# Altium PCB PCB1.PcbDoc
Units mil, origin at the board's own origin, x right, y up, seen from the top; angles counter-clockwise.
Board outline 3351 x 1044 mil, 2 copper layers (Top Layer, Bottom Layer), stack 60.4 mil thick; 8 components, 6 nets, 22 pads, 0 vias.
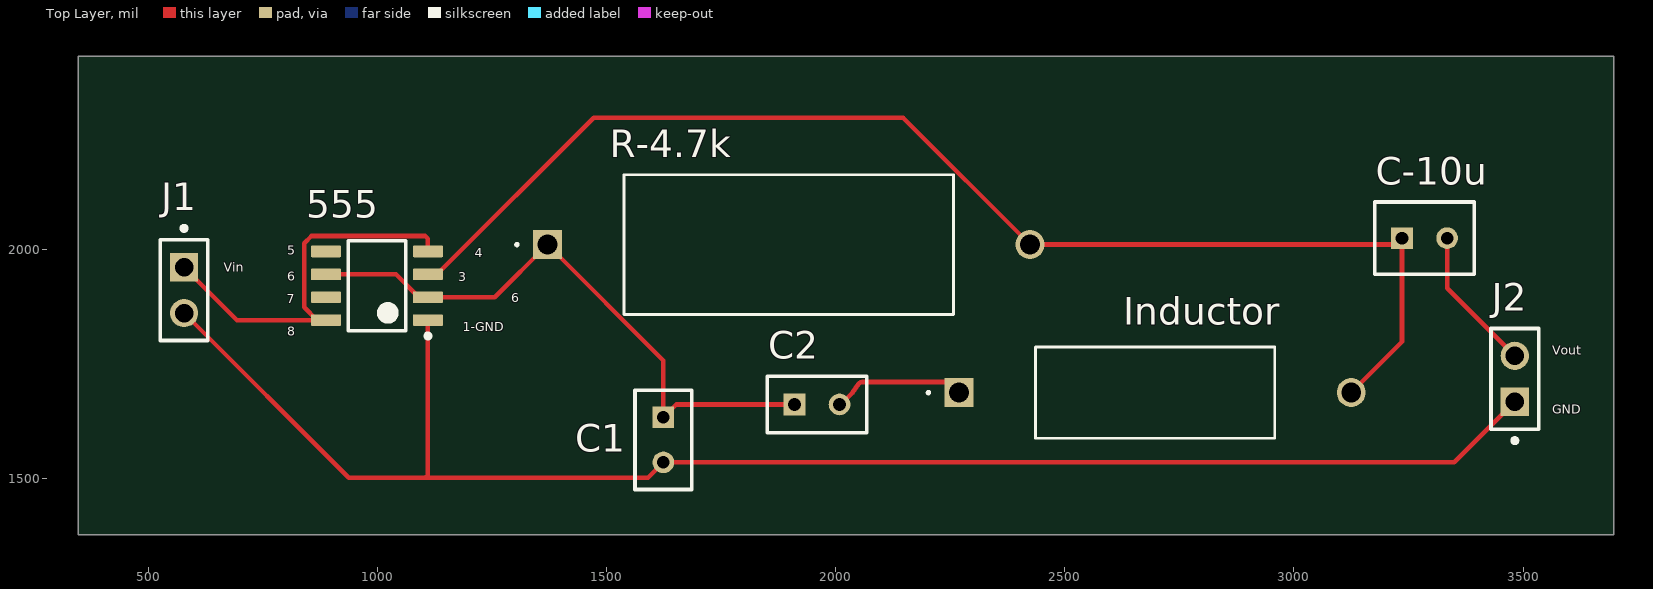
[diagram p0: Top Layer view]
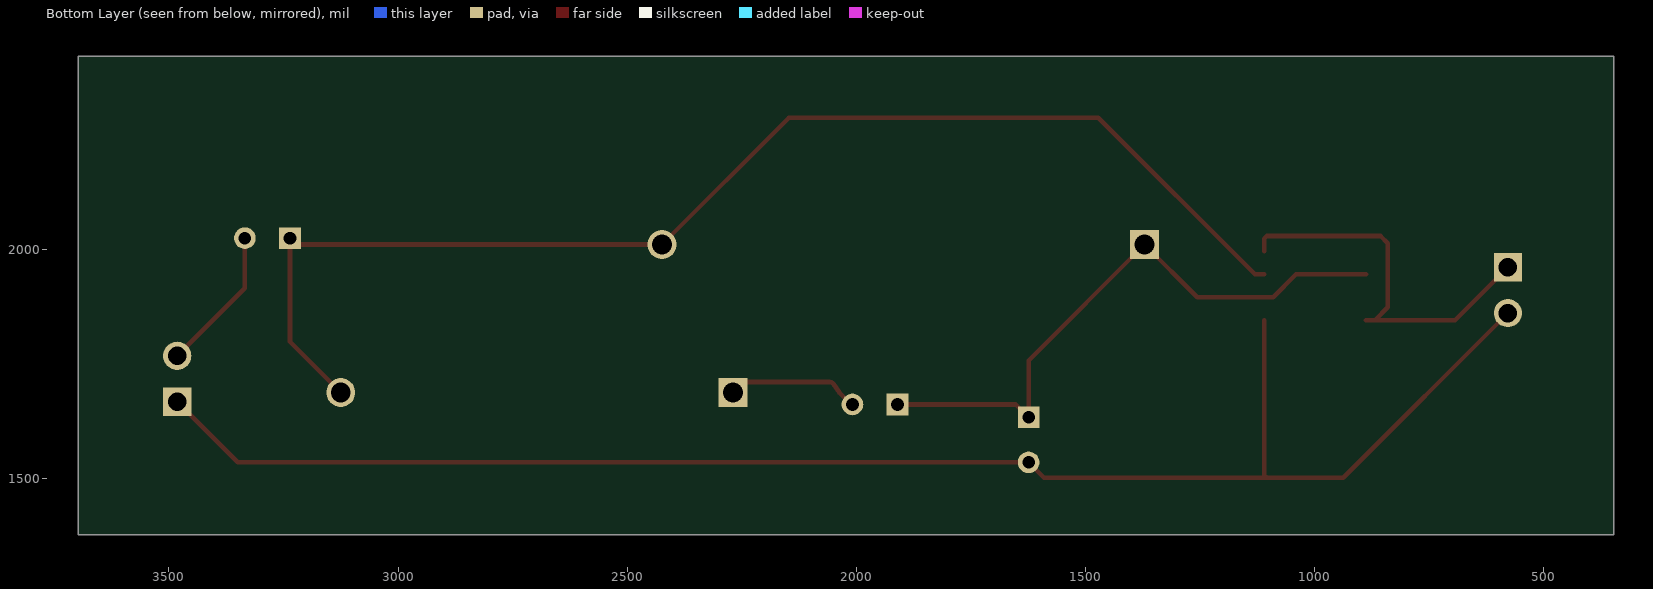
[diagram p1: Bottom Layer view, seen from below]
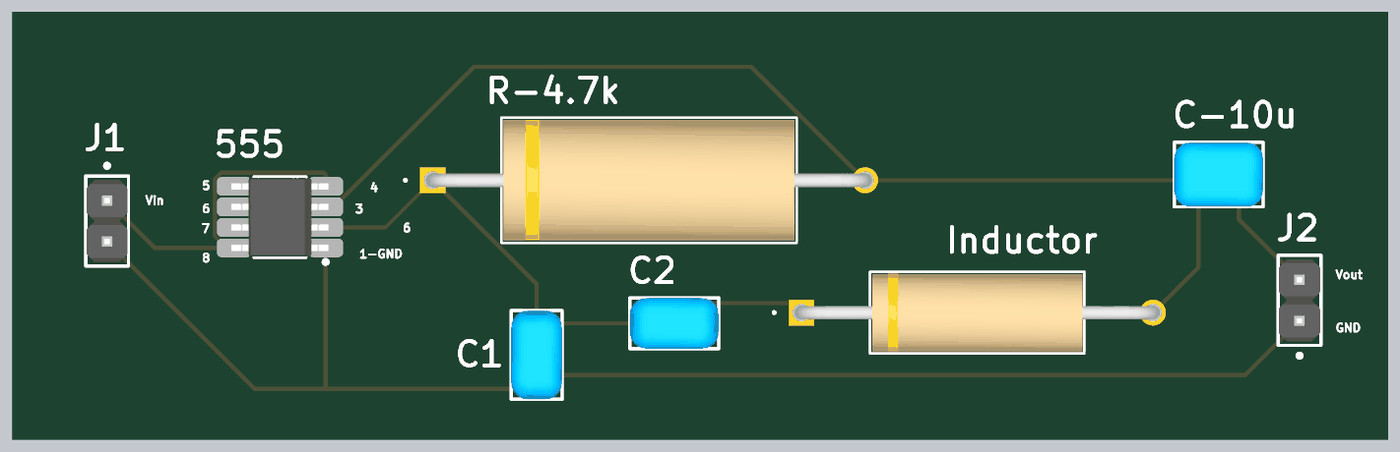
[diagram p2: 3D render of the assembled board from above, using the file's embedded part models]

## Layer stack, top to bottom
Top Solder: solder mask 0.5, Solder Resist, Dk 3.3
Top Layer: signal copper 0.7
Dielectric1: core 59, FR-4, Dk 4.3
Bottom Layer: signal copper 0.7
Bottom Solder: solder mask 0.5, Solder Resist, Dk 3.3

## Board outline
347,1377 347,2421 3698,2421 3698,1377

## Design rules (kind name [scope] priority, off if disabled: settings)
Clearance [All] p1: gap=10 ignorepadtopadclearanceinfootprint=FALSE
DiffPairsRouting [All] p1: maxlimit=10 minlimit=10 mostfreqgap=10 toplayer_minwidth=10 toplayer_maxwidth=10 toplayer_prefwidth=10 bottomlayer_minwidth=10 bottomlayer_maxwidth=10 bottomlayer_prefwidth=10 maxuncoupledlength=500
HoleSize [All] p1: absolutevalues=TRUE maxlimit=300 minlimit=10 maxpercent=80.000 minpercent=20.000
MinimumAnnularRing [All] p1 off: minimumring=10
MinimumSolderMaskSliver [All] p1 off: minsoldermaskwidth=10
PasteMaskExpansion [All] p1: expansion=10
PlaneClearance [All] p1: clearance=15
PlaneConnect [All] p1: pad.planeconnectstyle=Relief pad.reliefexpansion=20 pad.reliefentries=4 pad.reliefconductorwidth=10 pad.reliefairgap=10 via.planeconnectstyle=Direct via.reliefexpansion=20 via.reliefentries=4 via.reliefconductorwidth=10 via.reliefairgap=10
PolygonConnect [All] p1: thpad.connectstyle=Relief thpad.reliefconductorwidth=10 thpad.reliefentries=4 thpad.polygonreliefangle="90 Angle" thpad.airgapwidth=10 smdpad.connectstyle=Relief smdpad.reliefconductorwidth=10 smdpad.reliefentries=4 smdpad.polygonreliefangle="90 Angle" smdpad.airgapwidth=10 via.connectstyle=Direct via.reliefconductorwidth=10 via.reliefentries=4 via.polygonreliefangle="90 Angle" via.airgapwidth=10
RoutingVias [All] p1: holewidth=10 width=20 viastyle="Through Hole" minholewidth=10 minwidth=20 maxholewidth=10 maxwidth=20
SMDNeckDown [All] p1: percent=100.000
SilkToSolderMaskClearance SilkscreenOverComponentPads [IsPad] p1: minsilkscreentomaskgap=10 clearancetoexposedcopper=TRUE
SolderMaskExpansion [All] p1: expansion=10 istentingtop=FALSE
SupplyNets "Schematic Supply Nets" [InNet('GND')] p1: voltage=0.000
Width [All] p1: maxlimit=10 minlimit=10 preferedwidth=10
23 further rules are at their usual default settings.

## Components (designator, comment, footprint, x,y, rotation, side; value= is the part's Value field where it differs from the comment)
555 "LM555CM" D0008A_M 999,1920 r180 top (schematic designator U1)
C1 "RCER71H105K2DBH03A" FP-RCE2A2-MFG 1624,1583.79 r270 top
C2 "RCER71H105K2DBH03A" FP-RCE2A2-MFG 1959.21,1661 r0 top
C-10u "RCER71E106K3DBH03A" FP-RCE3DB-MFG 3285,2024 r0 top (schematic designator C3)
Inductor "AC03000003000JAC00" RES_AC03_VIS 2269,1687 r0 top (schematic designator R2)
J1 "M20-9990246" FP-M20-9990246-MFG 577.99,1910.5 r270 top
J2 "M20-9990246" FP-M20-9990246-MFG 3482,1717 r90 top
R-4.7k "AC05000004701JAC00" RES_AC05_VIS 1371,2010 r0 top (schematic designator R1)

## Footprints (in the part's own frame and the unit in brackets; to place one, negate y for a bottom-side part, rotate by r counter-clockwise, add the part's x,y. Pads: shape width x height; smd on the part's side, far side on the other; paste and mask are expansions set on the pad)
D0008A_M [mm] "SOIC, 8-Leads, Body 5x4mm, Pitch 1.27mm, IPC Low Density"
  rrect15% 1.65x0.65 smd: 1(-2.825,1.905) 2(-2.825,0.635) 3(-2.825,-0.635) 4(-2.825,-1.905) 5(2.825,-1.905) 6(2.825,-0.635) 7(2.825,0.635) 8(2.825,1.905)
  silkscreen extent -2.95,-2.5 1.6,2.9, body extent -3,-2.45 3,2.45, height 1.63
FP-M20-9990246-MFG [mm]
  rect 1.57x1.57 hole 1.02 paste-2539.97 mask+0: 1(-1.27,0)
  round 1.57 hole 1.02 paste-2539.97 mask+0: 2(1.27,0)
  silkscreen extent -3.55,-1.32 2.79,1.32, body extent -2.89,-1.42 2.89,1.42, height 0.25
FP-RCE2A2-MFG [mm]
  rect 1.2x1.2 hole 0.7 paste-2539.97 mask+0: 1(-1.25,0)
  round 1.2 hole 0.7 paste-2539.97 mask+0: 2(1.25,0)
  silkscreen extent -2.75,-1.58 2.75,1.58, body extent -2.85,-1.68 2.85,1.68, height 0.25
FP-RCE3DB-MFG [mm]
  rect 1.2x1.2 hole 0.7 paste-2539.97 mask+0: 1(-1.25,0)
  round 1.2 hole 0.7 paste-2539.97 mask+0: 2(1.25,0)
  silkscreen extent -2.75,-2 2.75,2, body extent -2.85,-2.1 2.85,2.1, height 0.25
RES_AC03_VIS [mil]
  rect 63x63 / inner round 60 / far side rect 63x63 hole 43 paste-99999 mask+0: 1(0,0)
  round 63 / inner round 60 / far side round 63 hole 43 paste-99999 mask+0: 2(856,0)
  silkscreen extent -69,-100 689,100, body extent -16,-95 873,95, height 189
RES_AC05_VIS [mil]
  rect 63x63 / inner round 60 / far side rect 63x63 hole 43 paste-99999 mask+0: 1(0,0)
  round 63 / inner round 60 / far side round 63 hole 43 paste-99999 mask+0: 2(1053,0)
  silkscreen extent -69,-152 886,152, body extent -16,-147 1069,147, height 295

## Part data
555: library part CMP-00023-00002-2, "Highly Stable 555 Timer for Generating Accurate Time Delays and Oscillation, 4.5 to 16 V, 0 to 70 degC, 8-Pin SOIC (D), Tube", Case/Package=SOIC, Frequency=100kHz, Manufacturer="Texas Instruments (TI)", Max Operating Temperature=70°C, Max Ouput Current=-200mA, Max Supply Voltage=16V, Min Operating Temperature=0°C, Min Supply Voltage=4.5V, Nominal Supply Current=3mA, Package Description="8-Pin Small Outline Integrated Circuit, Body 4.9 x 3.9 mm, Pitch 1.27 mm", Package Quantity=95, Package Reference=D0008A, Package Version="4040047-3/M, 06/2011", Power=1.18W, Channels=1, Datasheet URL=http://www.ti.com/lit/ds/symlink/lm555.pdf, Datasheet Version="SNAS548D, 01/2015", Manufacturer URL=http://www.ti.com/, Mounting Technology=SM, Package URL=http://www.ti.com/lit/ml/msoi002j/msoi002j.pdf, Packaging=Rail/Tube, Pins=8, RoHS Compliant=True
C1 C2: library part CMP-06035-042751-1, "Cap Ceramic 1uF 50V X7R ±10% Radial 2.5mm +125°C Automotive Ammo Pack", Capacitance=1uF, Case/Package=Radial, Dielectric=X7R, Max Operating Temperature=125°C, Min Operating Temperature=-55°C, Package Quantity=2000, Ratings=AEC-Q200, Resistor Type=Ceramic, Tolerance=10%, Voltage Rating=50V, Height=4mm, Height - Seated (Max)=0.157inch, Lead Diameter=0.5mm, Lead Pitch=0.098inch, Lead/Base Style=Straight, Length=0.217inch, Mount="Through Hole", Packaging="Tape and Reel", Termination=Radial, Voltage Rating (DC)=50V, Width=0.124inch
C-10u: library part CMP-06035-005830-1, "Cap Ceramic 10uF 25V X7R ±10% Radial 2.5mm +125°C Automotive Ammo Pack", Capacitance=10uF, Case/Package=Radial, Dielectric=X7R, Max Operating Temperature=125°C, Min Operating Temperature=-55°C, Package Quantity=1500, Ratings=AEC-Q200, Resistor Type=Ceramic, Tolerance=10%, Voltage Rating=25V, Height=5mm, Height - Seated (Max)=0.197inch, Lead Diameter=0.5mm, Lead Pitch=0.098inch, Lead/Base Style=Straight, Length=0.217inch, Mount="Through Hole", Packaging="Tape and Reel", Termination=Radial, Voltage Rating (DC)=25V, Width=0.157inch
Inductor: library part CMP-00030-39746760-1, "AC03000003000JAC00 Res Wirewound 300 Ohm 5% 3W -80ppm/C to -10ppm/C Conformal AXL Thru-Hole Ammo Pack", Case/Package=Axial, Max Operating Temperature=275°C, Max Power Dissipation=3W, Min Operating Temperature=-40°C, Resistance=300Ω, Temperature Coefficient=-80ppm/°C, Tolerance=5%, Voltage Rating=30V, Composition=Wirewound, Contact Plating=Tin, Diameter=4.8mm, Features="Flame Retardant Coating", Lead Diameter=800µm, Length=13mm, Military Standard=Not, NexarPartId=39746760, Number of Pins=2, Number of Terminations=2, Packaging="Cut Tape (CT)", Power Rating=3W, REACH SVHC=Unknown, RoHS=Compliant, Schedule B="8533210080, 8533210080", Termination=Axial, Thickness=4.8006mm, Voltage Rating (DC)=30V, Width=4.8mm
J1 J2: library part CMP-15831-000009-1, "CONN HEADER VERT 2POS 2.54MM", Current Rating=3A, Manufacturer=Harwin, Temperature="-40°C to +105°C", Temperature Range High=+105°C, Temperature Range Low=-40°C, Automotive=No, Category=Conn, ComponentLink2Description=Datasheet, ComponentLink2URL=https://cdn.harwin.com/pdfs/M20-999.pdf, Conn Gender=Male, Conn Orientation=Vertical, Contact Material=Tin,Nickel, Device Class L1=Connectors, Device Class L2="Headers and Wire Housings", Device Class L3=unset, Digikey Description="CONN HEADER VERT 2POS 2.54MM", Height=8.99mm, Lead Free=Yes, Manufacturer Part Number=M20-9990246, Mouser Description="2.54mm (0.1\") Pitch SIL Vertical PC Tail Pin Header, 6.1mm mating pin height, tin, 2 contacts", Number Of Contacts=2, Number Of Rows=1, Octopart=https://octopart.com/m20-9990246-harwin-2590635, Package=M20-9990246, Pitch=2.54mm, RoHS=TRUE
R-4.7k: library part CMP-00030-39747417-1, "AC05000004701JAC00 VISHAY AC05000004701JAC00 Through Hole Resistor, AC Series, 4.7 kohm, 5 W, 5%, Axial Leaded", Case/Package=Conformal, Max Operating Temperature=275°C, Max Power Dissipation=5W, Min Operating Temperature=-40°C, Resistance=4.7kΩ, Temperature Coefficient=180ppm/°C, Tolerance=5%, Voltage Rating=153V, Composition=Wirewound, Contact Plating=Tin, Diameter=7.5mm, Features="Flame Retardant Coating", Lead Diameter=800µm, Lead Free="Lead Free", Length=18mm, Military Standard=Not, NexarPartId=39747417, Number of Pins=2, Number of Terminations=2, Packaging="Tape & Box (TB)", Power Rating=5W, Radiation Hardening=No, REACH SVHC=Unknown, RoHS=Compliant, Schedule B="8533210080, 8533210080", Termination=Axial, Voltage Rating (DC)=153V, Width=7.49mm

## Nets (pads, with @x,y where several pads share a name; then routed paths per layer and width w, separated by ;. In a path a pad name is that pad's centre, name@x,y a point inside that pad or via, vN(x,y) a via of type N, cw(c..) or ccw(c..) an arc to the next point about the centre after c; other vN are vias at no path point)
GND: 555.1 C1.2 J1.2 J2.1 | length 3468.1
  Top Layer w10: J1.2 937.49,1501 1104.36,1501 ; 555.1 1110.22,1506.86 1104.36,1501 ; J2.1 3349.57,1534.57 C1.2 1590.43,1501 1104.36,1501
NetC1_1: 555.2 555.6 C1.1 C2.1 R-4.7k.1 | length 1331
  Top Layer w10: 555.6 1040.54,1945 1090.54,1895 555.2 1256,1895 R-4.7k.1 1624,1757 C1.1 1652,1661 C2.1
NetC2_2: C2.2 Inductor.1 | length 291.1
  Top Layer w10: C2.2 2011.05,1661 2037.05,1687 2050.02,1705.7 cw(c2058.23,1700) 2058.23,1710 2242.5,1710 Inductor.1
NetC3_1: 555.3 C-10u.1 Inductor.2 R-4.7k.2 | length 2770.7
  Top Layer w10: 555.3 1129.91,1945 1471.91,2287 2147,2287 R-4.7k.2 3221.79,2010 C-10u.1 3235.79,1797.79 Inductor.2
NetC3_2: C-10u.2 J2.2 | length 318.2
  Top Layer w10: C-10u.2 3334.21,1914.79 J2.2
NetJ1_1: 555.4 555.8 J1.1 | length 863.4
  Top Layer w10: J1.1 693.49,1845 555.8 868.09,1845 840.3,1872.8 840.3,2012.88 856.07,2028.65 1104.36,2028.65 1110.22,2022.8 555.4
pads on no net: 555.5 555.7

## Silkscreen, mask and mechanical layers (free items; w line width, h text height)
Top Overlay:
  text "5" at 803,1987.18 h20
  text "4" at 1212,1982.18 h20
  text "Vin" at 665,1951 h20
  text "6" at 803,1931.07 h20
  text "3" at 1176,1930.18 h20
  text "6" at 1292,1884.18 h20
  text "7" at 802.02,1882.4 h20
  text "1-GND" at 1186,1820.66 h20
  text "8" at 803,1810.66 h20
  text "Vout" at 3563.52,1770 h20
  text "GND" at 3563.52,1640.24 h20